# Altium PCB tfcard_shield.PcbDoc
Units mil, origin at the board's own origin, x right, y up, seen from the top; angles counter-clockwise.
Board outline 1435 x 2025.59 mil, 2 copper layers (Top Layer, Bottom Layer); 10 components, 29 nets, 85 pads, 8 vias.
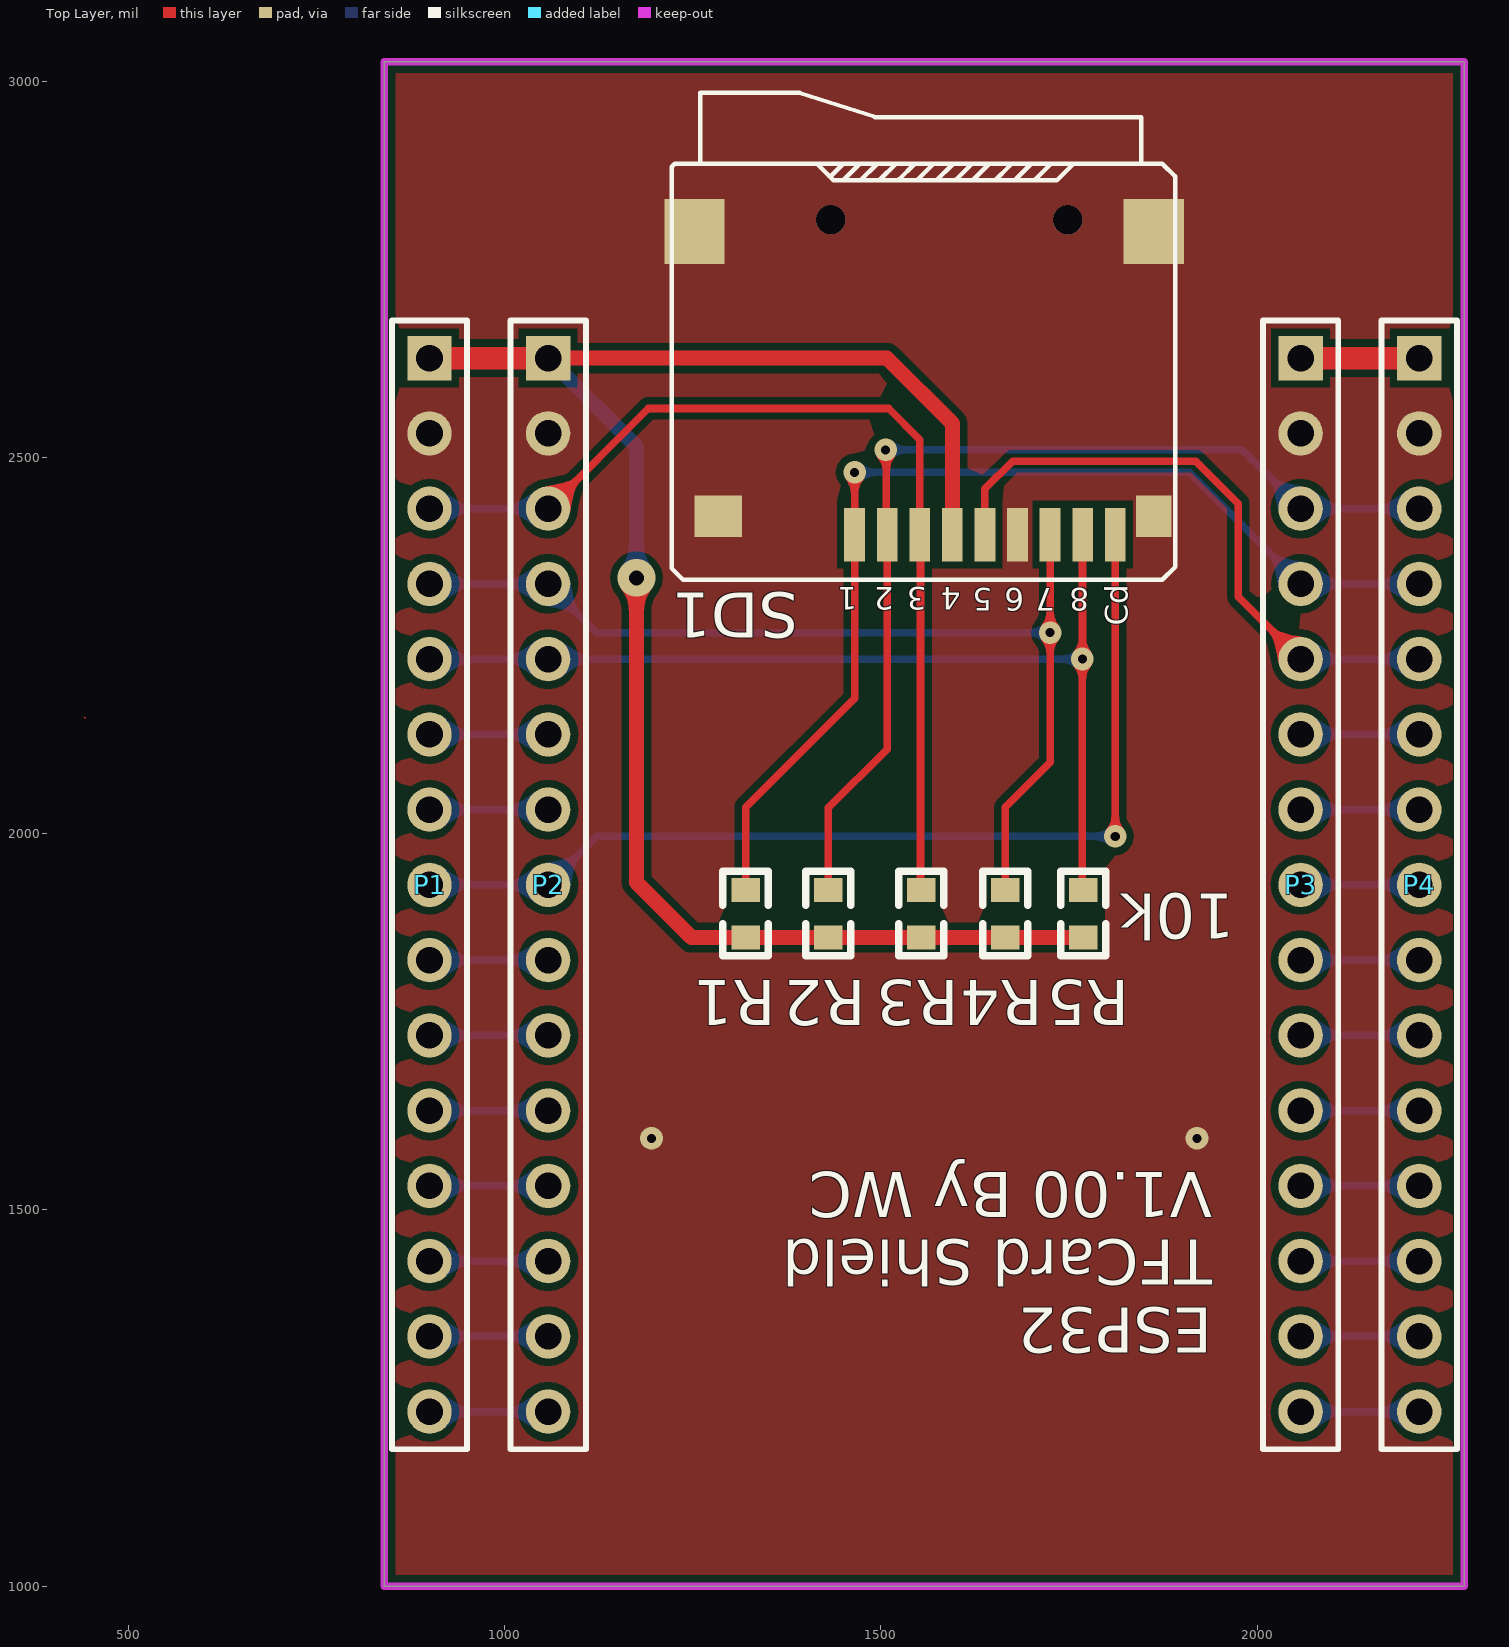
[diagram p0: Top Layer view]
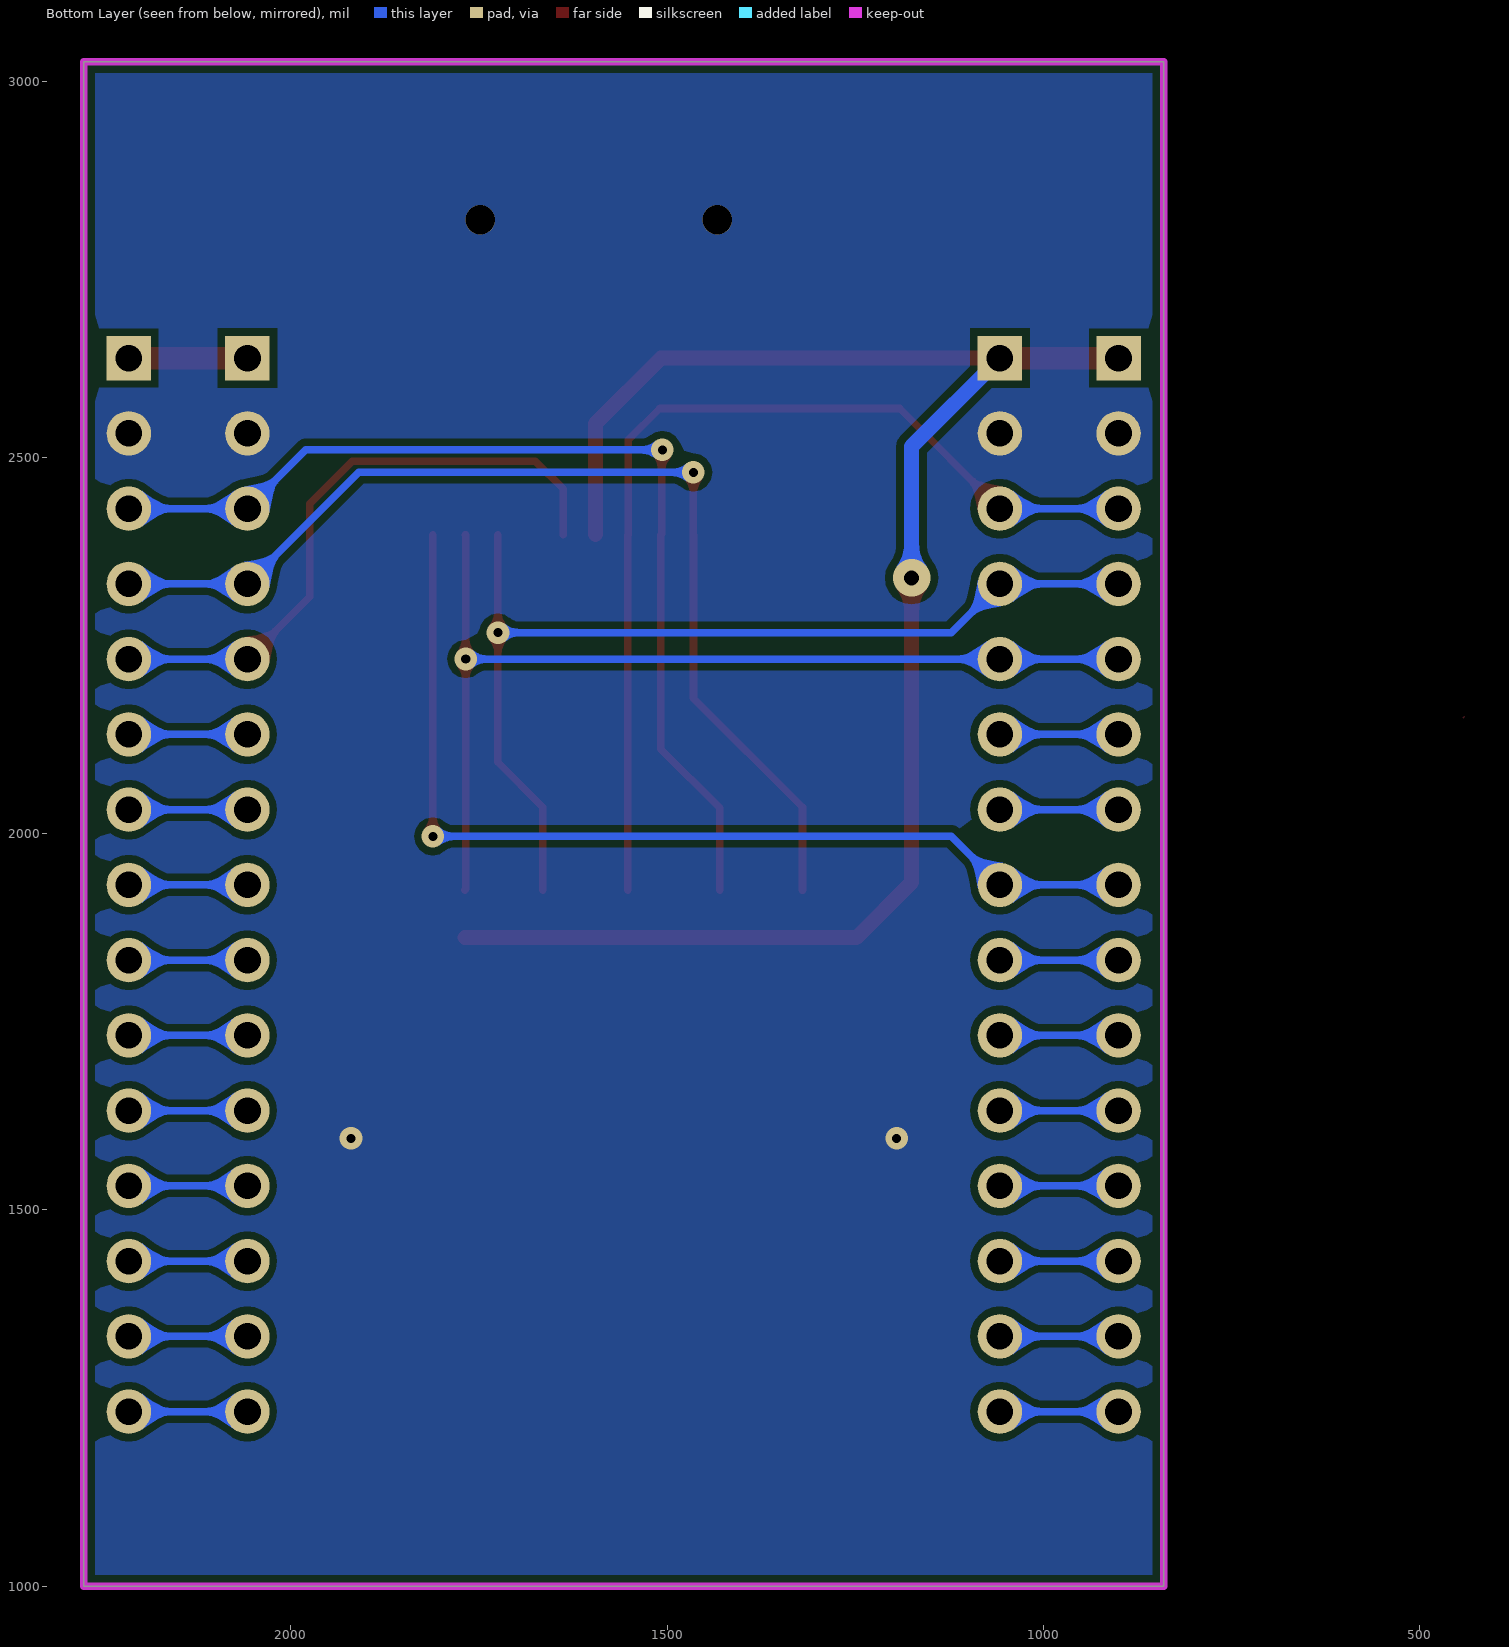
[diagram p1: Bottom Layer view, seen from below]
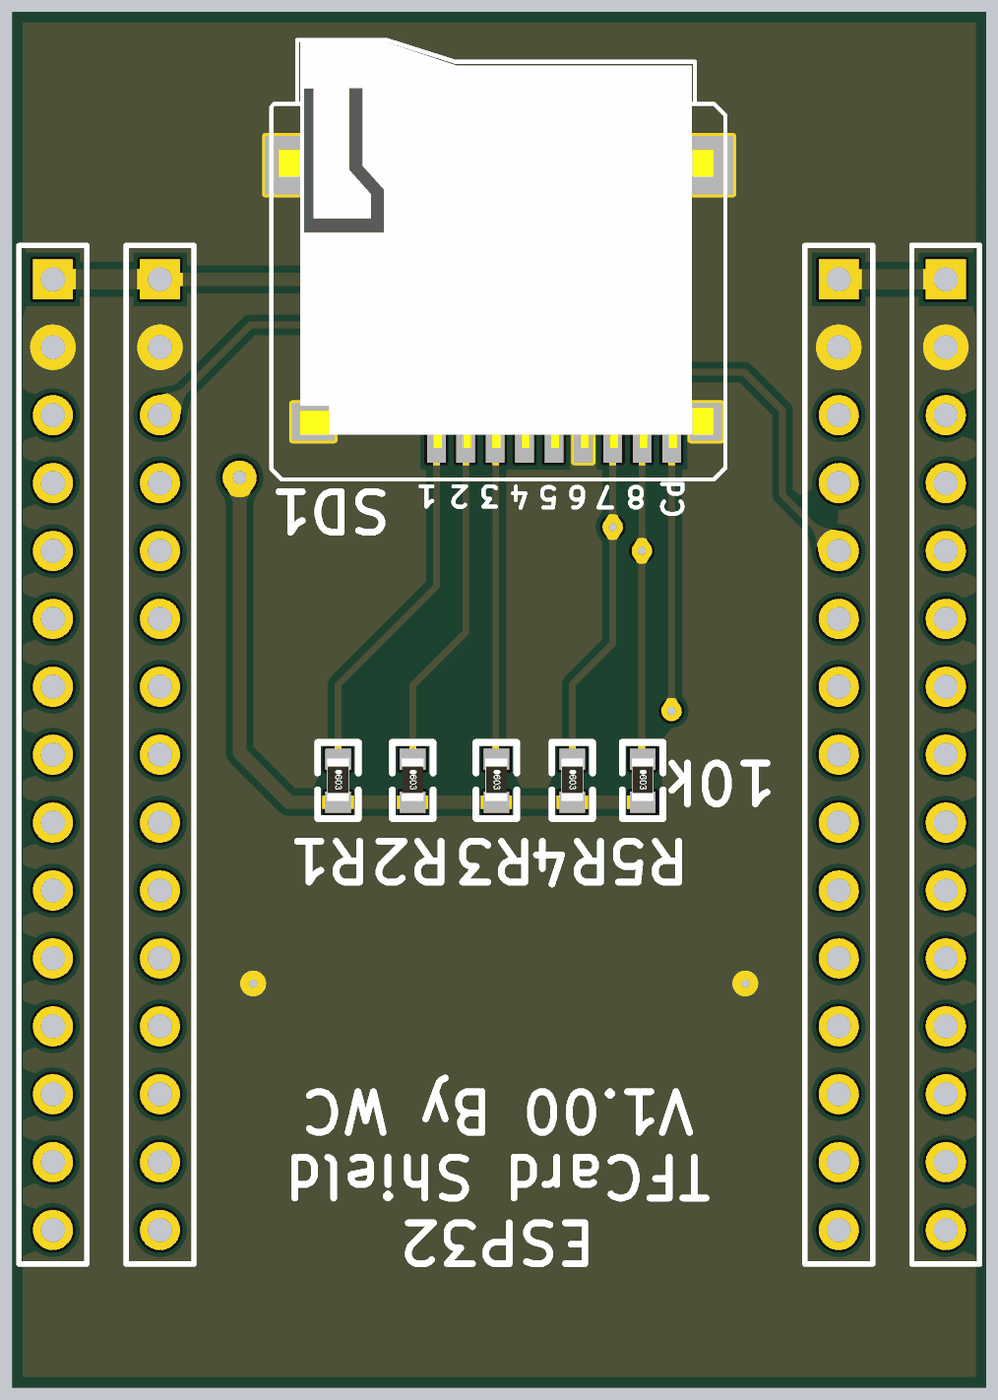
[diagram p2: 3D render of the assembled board from above, using the file's embedded part models]

## Layer stack, top to bottom
Top Solder: solder mask 0.4, Solder Resist, Dk 3.5
Top Layer: signal copper 1.4
Dielectric 1: dielectric 12.6, FR-4, Dk 4.8
Bottom Layer: signal copper 1.4
Bottom Solder: solder mask 0.4, Solder Resist, Dk 3.5

## Board outline
840,1000 840,3025.59 2275,3025.59 2275,1000

## Design rules (kind name [scope] priority, off if disabled: settings)
Clearance [All] p1: gap=10 ignorepadtopadclearanceinfootprint=FALSE except(0: Arc-Hole Track-Hole SMDPad-Hole THPad-Hole Via-Hole Fill-Hole Poly-Hole Region-Hole Text-Hole)
PolygonConnect [All] p1: connectstyle=Direct reliefconductorwidth=10 reliefentries=4 polygonreliefangle="90 Angle" airgapwidth=10
RoutingVias [All] p1: holewidth=12 width=24 viastyle="Through Hole" minholewidth=10 minwidth=20 maxholewidth=28 maxwidth=50
SolderMaskExpansion [All] p1: expansion=4 istentingtop=FALSE
Width [All] p1: maxlimit=50 minlimit=10 preferedwidth=10
30 further rules are at their usual default settings.

## Components (designator, comment, footprint, x,y, rotation, side; value= is the part's Value field where it differs from the comment)
P1 "Header 15" HDR1X15 900,2631.87 r270 top
P2 "Header 15" HDR1X15 1057.68,2631.87 r270 top
P3 "Header 15" HDR1X15 2057.67,2631.87 r270 top
P4 "Header 15" HDR1X15 2215.35,2631.87 r270 top
R1 "RES" 0603R 1320,1925 r270 top
R2 "RES" 0603R 1430,1925 r270 top
R3 "RES" 0603R 1553.3,1925 r270 top
R4 "RES" 0603R 1665,1925 r270 top
R5 "RES" 0603R 1768.8,1925 r270 top
SD1 "MicroSD" "Micro SD" 1862.5,2800 r180 top locked

## Footprints (in the part's own frame and the unit in brackets; to place one, negate y for a bottom-side part, rotate by r counter-clockwise, add the part's x,y. Pads: shape width x height; smd on the part's side, far side on the other; paste and mask are expansions set on the pad)
0603R [mm]
  rect 0.8x0.965 smd: 1(0,0) 2(1.6,0)
  silkscreen extent -0.64,-0.76 2.21,0.76, body extent -0.04,-0.41 1.56,0.41, height 0.45
HDR1X15 [mm] "Connector; Header; 15 Position"
  rect 1.5x1.5 hole 0.9: 1(0,0)
  round 1.5 hole 0.9: 2(2.54,0) 3(5.08,0) 4(7.62,0) 5(10.16,0) 6(12.7,0) 7(15.24,0) 8(17.78,0) 9(20.32,0) 10(22.86,0) 11(25.4,0) 12(27.94,0) 13(30.48,0) 14(33.02,0) 15(35.56,0)
  silkscreen extent -1.27,-1.27 36.83,1.27
"Micro SD" [mm]
  rect 1.2x1.4 smd: 0(0,9.6)
  rect 2.032x2.2 smd: 0(0,0) 0(15.5,0)
  round 1 hole 1 unplated: 0(2.9,-0.4) 0(10.9,-0.4)
  rect 1.6x1.4 smd: 0(14.7,9.6)
  rect 0.7x1.8 smd: 1(10.1,10.227) 2(9,10.227) 3(7.9,10.227) 4(6.8,10.227) 5(5.7,10.227) 6(4.6,10.227) 7(3.5,10.227) 8(2.4,10.227) 9(1.3,10.227)
  Top Layer lines w0.03: 36.114,16.373 36.064,16.423
  silkscreen extent -0.72,-4.68 16.27,11.75, body extent -0.27,-4.63 16,10.57, height 1.8

## Part data
P1 P2 P3 P4: "Header, 15-Pin", LatestRevisionDate=17-Jul-2002, LatestRevisionNote="Re-released for DXP Platform.", Publisher="Altium Limited"

## Via types
v1: diameter 30, hole 12, Top Layer to Bottom Layer, 7 vias
v2: diameter 50, hole 20, Top Layer to Bottom Layer, 1 vias

## Nets (pads, with @x,y where several pads share a name; then routed paths per layer and width w, separated by ;. In a path a pad name is that pad's centre, name@x,y a point inside that pad or via, vN(x,y) a via of type N, cw(c..) or ccw(c..) an arc to the next point about the centre after c; other vN are vias at no path point)
3V3: P1.1 P2.1 R1.2 R2.2 R3.2 R4.2 R5.2 SD1.4 | length 2248.2
  Top Layer w10: SD1.4 SD1.4@1595,2397.58
  Top Layer w20: P2.1 1508.13,2631.87 1595,2545 SD1.4@1595,2397.58 ; v2(1175,2340) 1175,1935 1247.99,1862.01 R1.2 R2.2 R3.2 R4.2 R5.2
  Top Layer w30: P1.1 P2.1
  Bottom Layer w20: P2.1 1175,2514.55 v2(1175,2340)
GND: P1.2 P2.2 P3.2 P4.2 SD1.0 SD1.6
  other v1: 1195,1595 1920,1595
NetP1_3: P1.3 P2.3 R3.1 SD1.3 | length 1323.9
  Top Layer w10: P1.3 P1.3@900.81,2431.07 ; P2.3 1190.81,2565 1510,2565 1551.48,2523.52 SD1.3 1552.5,2396.34 R3.1@1552.5,1925
  Bottom Layer w10: P1.3 P2.3
NetP1_4: P1.4 P2.4 R4.1 SD1.7 | length 1348.8
  Top Layer w10: R4.1 1665,2035 1724.7,2094.7 v1(1724.7,2267.06) 1724.7,2275 1724.85,2275.15 1724.85,2397.21 SD1.7
  Bottom Layer w10: P1.4 P2.4 1122.49,2267.06 v1(1724.7,2267.06)
NetP1_5: P1.5 P2.5 R5.1 SD1.8 | length 1340.7
  Top Layer w10: SD1.8 1767.78,2397.13 1767.78,2232.32 v1(1767.55,2232.09) 1767.55,1926.25 R5.1
  Bottom Layer w10: P1.5 P2.5 1767.34,2231.87 v1(1767.55,2232.09)
NetP1_6: P1.6 P2.6 | length 157.7
  Bottom Layer w10: P1.6 P2.6
NetP1_7: P1.7 P2.7 | length 157.7
  Bottom Layer w10: P1.7 P2.7
NetP1_8: P1.8 P2.8 SD1.9 | length 1339.1
  Top Layer w10: v1(1811.32,1996.32) SD1.9
  Bottom Layer w10: P1.8 P2.8 1122.12,1996.32 v1(1811.32,1996.32)
NetP1_9: P1.9 P2.9 | length 157.7
  Bottom Layer w10: P1.9 P2.9
NetP1_10: P1.10 P2.10 | length 157.7
  Bottom Layer w10: P1.10 P2.10
NetP1_11: P1.11 P2.11 | length 157.7
  Bottom Layer w10: P1.11 P2.11
NetP1_12: P1.12 P2.12 | length 157.7
  Bottom Layer w10: P1.12 P2.12
NetP1_13: P1.13 P2.13 | length 157.7
  Bottom Layer w10: P1.13 P2.13
NetP1_14: P1.14 P2.14 | length 157.7
  Bottom Layer w10: P1.14 P2.14
NetP1_15: P1.15 P2.15 | length 157.7
  Bottom Layer w10: P1.15 P2.15
NetP3_1: P3.1 P4.1 | length 157.7
  Top Layer w30: P3.1 P4.1
NetP3_3: P3.3 P4.3 R2.1 SD1.2 | length 1359.9
  Top Layer w10: R2.1 1430,2034.19 1508.17,2112.36 SD1.2 1507.2,2398.33 1507.2,2509.03 v1(1506.24,2510)
  Bottom Layer w10: v1(1506.24,2510) 1980,2510 2057.67,2432.33 P3.3 P4.3
NetP3_4: P3.4 P4.4 R1.1 SD1.1 | length 1426.9
  Top Layer w10: R1.1 1320,2035 1465,2180 1464.86,2180.14 SD1.1 SD1.1 1464.93,2479.93 v1(1465,2480)
  Bottom Layer w10: v1(1465,2480) 1909.55,2480 P3.4 P4.4
NetP3_5: P3.5 P4.5 SD1.5 | length 834.8
  Top Layer w10: SD1.5 1638.09,2458.09 1675,2495 1918.43,2495 1975,2438.43 1975,2314.55 P3.5
  Bottom Layer w10: P3.5 P4.5
NetP3_6: P3.6 P4.6 | length 157.7
  Bottom Layer w10: P3.6 P4.6
NetP3_7: P3.7 P4.7 | length 157.7
  Bottom Layer w10: P3.7 P4.7
NetP3_8: P3.8 P4.8 | length 157.7
  Bottom Layer w10: P3.8 P4.8
NetP3_9: P3.9 P4.9 | length 157.7
  Bottom Layer w10: P3.9 P4.9
NetP3_10: P3.10 P4.10 | length 157.7
  Bottom Layer w10: P3.10 P4.10
NetP3_11: P3.11 P4.11 | length 157.7
  Bottom Layer w10: P3.11 P4.11
NetP3_12: P3.12 P4.12 | length 157.7
  Bottom Layer w10: P3.12 P4.12
NetP3_13: P3.13 P4.13 | length 157.7
  Bottom Layer w10: P3.13 P4.13
NetP3_14: P3.14 P4.14 | length 157.7
  Bottom Layer w10: P3.14 P4.14
NetP3_15: P3.15 P4.15 | length 157.7
  Bottom Layer w10: P3.15 P4.15

## Polygon pours and split planes (outlines as drawn)
GND on Top Layer "GND_L01_P000" (solid, remove dead copper, pour order 0): 840,3025.59 2275,3025.59 2275,1000 840,1000
GND on Bottom Layer "GND_L02_P002" (solid, remove dead copper, pour order 2): 840,3025.59 2275,3025.59 2275,1000 840,1000

## Keep-outs
Keep-Out Layer:
  lines w10: 840,1000 1000,1000 2115.35,1000 2275,1000 2275,3025.59 2115.35,3025.59 1000,3025.59 840,3025.59 840,1000

## Silkscreen, mask and mechanical layers (free items; w line width, h text height)
Top Overlay:
  text "10k" at 1970,1920 h60 r180
  text "ESP32 / TFCard Shield / V1.00 By WC" at 1940,1550 h60 r180

## Text inside footprints (layer, text, board x,y; h text height)
SD1: Top Overlay "Cd" at 1827.79,2276.57 h30 r90; Top Overlay "8" at 1777.09,2326.39 h30 r180; Top Overlay "7" at 1731.86,2326.36 h30 r180; Top Overlay "6" at 1690.35,2326.4 h30 r180; Top Overlay "5" at 1647.86,2326.36 h30 r180; Top Overlay "4" at 1605.86,2327.36 h30 r180; Top Overlay "3" at 1561.04,2327.58 h30 r180; Top Overlay "2" at 1516.86,2327.36 h30 r180; Top Overlay "1" at 1468.51,2327.39 h30 r180